# Altium PCB 主板-0915改综合.PcbDoc (part 2 of 3)
Units mm, origin at the board's own origin, x right, y up, seen from the top; angles counter-clockwise.
Board outline 97.69 x 103.45 mm, 2 copper layers (Top Layer, Bottom Layer); 78 components, 74 nets, 243 pads, 282 vias.
Unrouted connection lines stored in the file: 6.
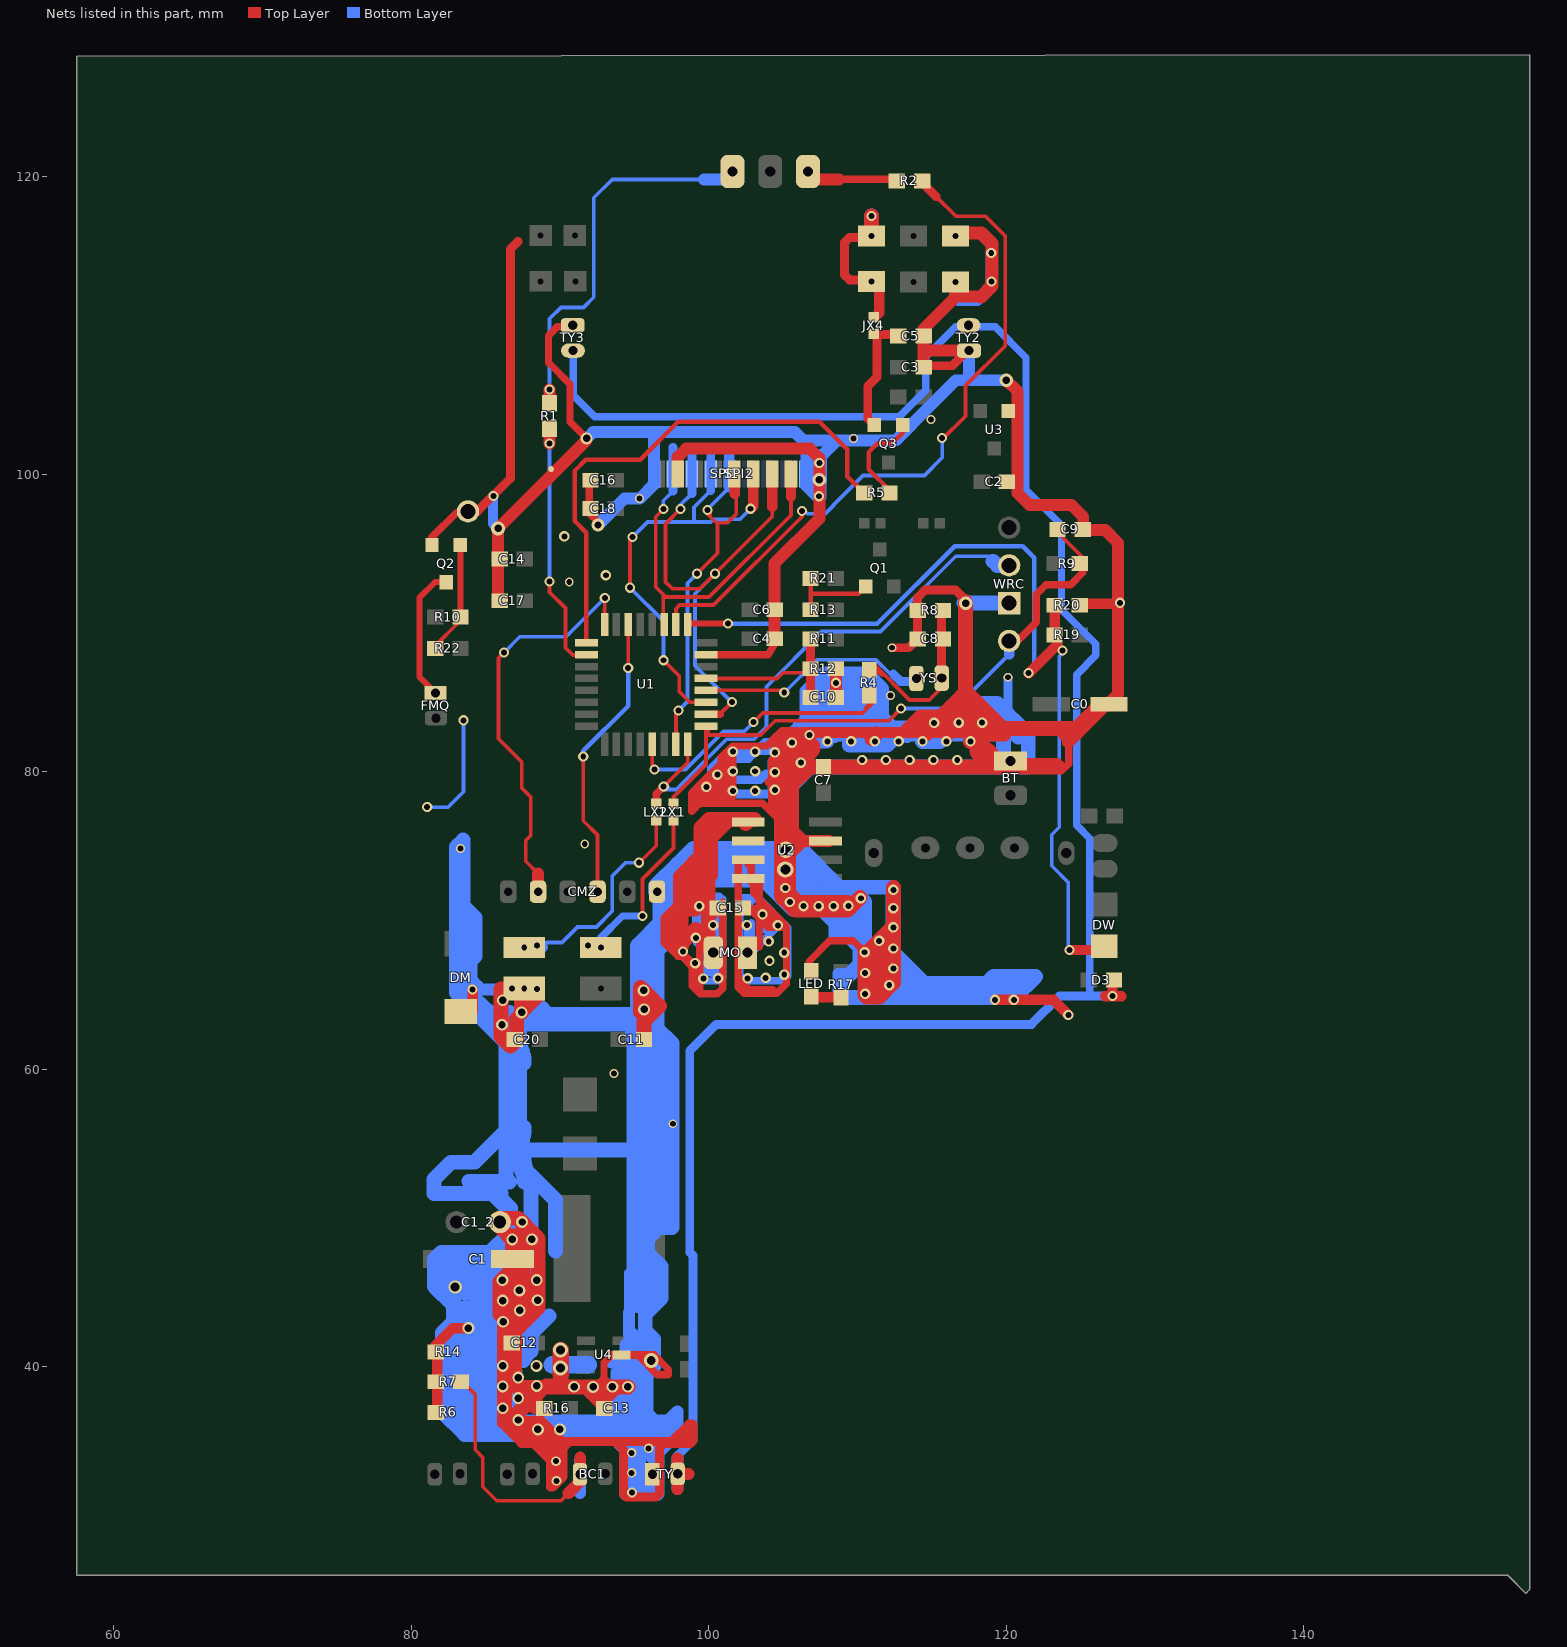
[diagram p2: the nets of this part, all layers, seen from the top]

## Via types
v1: diameter 0.7, hole 0.4, Top Layer to Bottom Layer, 111 vias
v2: diameter 0.68, hole 0.4, Top Layer to Bottom Layer, 90 vias
v3: diameter 0.8, hole 0.5, Top Layer to Bottom Layer, tented both sides, 27 vias
v4: diameter 0.6, hole 0.4, Top Layer to Bottom Layer, 13 vias
v5: diameter 0.9, hole 0.5, Top Layer to Bottom Layer, 8 vias
v6: diameter 0.65, hole 0.4, Top Layer to Bottom Layer, tented both sides, 6 vias
v7: diameter 0.8, hole 0.5, Top Layer to Bottom Layer, 6 vias
v8: diameter 1, hole 0.75, Top Layer to Bottom Layer, tented both sides, 5 vias
v9: diameter 3.4, hole 2.9, Top Layer to Bottom Layer, 4 vias
v10: diameter 0.8, hole 0.4, Top Layer to Bottom Layer, 2 vias
v11: diameter 1.1, hole 0.68, Top Layer to Bottom Layer, 2 vias
v12: diameter 1, hole 0.56, Top Layer to Bottom Layer, tented both sides, 2 vias
v13: diameter 1, hole 0.6, Top Layer to Bottom Layer, tented both sides, 2 vias
v14: diameter 0.9, hole 0.6, Top Layer to Bottom Layer, tented both sides, 1 vias
v15: diameter 0.95, hole 0.5, Top Layer to Bottom Layer, 1 vias
v16: diameter 0.7, hole 0.4, Top Layer to Bottom Layer, tented bottom, 1 vias
v17: diameter 1, hole 0.6, Top Layer to Bottom Layer, tented bottom, 1 vias

## Nets (pads, with @x,y where several pads share a name; then routed paths per layer and width w, separated by ;. In a path a pad name is that pad's centre, name@x,y a point inside that pad or via, vN(x,y) a via of type N, cw(c..) or ccw(c..) an arc to the next point about the centre after c; other vN are vias at no path point) (continued)
GND: BT.2 C0.2 C1.1 C1_2.1 C2.1 C3.1 C4.2 C5.1 C6.1 C7.1 C8.1 C9.1 C10.2 C11.2 C12.2 C13.2 C14.2 C16.1 C17.2 C18.1 C20.1 CMZ.2 DM.1 LED.1 pad.0@87.6,65.432 pad.0@89.408,100.355 pad.0@96.33,100.032 pad.0@116.6,112.932 pad.0@116.6,116.032 pad.4@83.82,97.511 Q2.2 R6.2 R7.1 R8.2 R12.1 R14.1 R16.2 R20.1 SPI1.7 SPI2.8 TY2.2 TY3.2 TY.2 U1.7 U2.3 U3.1 U4.2 WRC.2 | length 1496.6
  Top Layer w0.254: C0.2@126.695,84.557 C0.2@126.913,84.546
  Top Layer w0.495: U1.7@99.825,87.877 104.006,87.877 C4.2@104.523,88.724 ; C4.2@104.419,88.951 C4.2@104.65,88.951 ; C0.2@126.913,84.546 126.924,84.328 C0.2@126.924,84.633
  Top Layer w0.5: Q2.2@81.382,95.25 81.382,95.758 83.058,97.434 pad.4@84.201,97.434 ; 90.221,38.811 90.221,39.227 90.51,38.938 ; TY3.2@90.855,109.919 89.826,109.919 89.23,109.323 89.23,107.518 90.678,106.07 90.678,103.53 v7(91.796,102.413) ; v7@91.992,38.412 v7(92.227,38.647) 92.368,38.647 92.964,39.243 93.523,38.684 93.523,38.649 94.123,38.649 C13.2@92.939,37.465 ; C16.1@92.05,99.6 91.973,99.523 91.973,97.379 92.558,96.795 v5(92.558,96.596) ; 92.95,38.643 92.964,38.643 92.964,40.272 93.496,40.804 96.305,40.804 97.296,39.813 97.296,39.472 96.545,39.472 95.25,40.767 U4.2@94.539,40.767 ; 99.949,78.435 99.822,78.308 ; 104.013,79.299 104.242,79.527 ; 104.369,80.366 104.391,80.366 ; 104.572,82.423 104.496,82.347 ; 104.648,72.252 104.648,76.86 104.47,77.038 ; v1(105.588,81.966) 105.379,82.123 105.13,82.372 104.826,82.677 ; 106.248,82.779 112.981,82.779 ; 106.743,67.246 108.153,68.656 109.703,68.656 v1(110.49,67.869) ; LED.1@106.756,66.431 106.756,67.234 ; 116.459,82.779 117.831,82.779 ; 118.059,82.525 116.205,82.525 ; 118.059,82.537 116.218,82.537 ; 120.498,80.061 123.723,80.061 124.206,80.543 124.206,82.118 125.12,83.033 ; 124.003,81.915 124.003,82.525 124.003,82.753 124.117,82.639 ; 124.231,82.525 124.117,82.639 ; C0.2@126.924,84.633 C0.2@126.913,84.622 ; 99.416,77.902 98.857,77.343 98.857,78.562 100.838,80.543 100.838,80.975 101.6,81.737 103.886,81.737 104.47,82.321 ; 99.416,77.902 99.822,78.308 ; 99.416,77.902 99.289,77.775 99.263,77.775 99.263,78.99 101.397,81.124 101.397,80.747 ; 99.416,77.902 99.416,78.765 101.397,80.747 ; 99.416,77.902 103.607,77.902 104.242,77.267 ; 99.822,78.308 101.575,78.308 101.629,78.363 v1(101.629,78.715) v1(101.629,80.038) 101.629,80.979 101.397,80.747 ; 99.822,78.308 99.67,78.308 99.67,78.816 v1(99.847,78.994) 100.892,80.038 101.117,79.812 101.117,79.731 ; 100.635,79.248 101.117,79.731 ; 100.635,79.248 100,78.613 100.965,78.613 ; 100.635,79.248 100.635,78.943 100.965,78.613 ; 100.965,78.613 101.117,78.461 101.346,78.461 v1@101.346,79.959 ; 100.965,78.613 101.117,78.765 101.117,79.731 ; 101.117,79.731 v1@101.346,79.959 ; v1@101.346,79.959 101.397,80.01 101.397,80.747 ; 104.242,77.267 104.242,79.527 ; 104.242,77.267 104.47,77.038 ; 104.242,79.527 104.242,80.518 ; 104.242,79.527 104.391,79.527 104.391,80.366 ; 104.242,80.518 104.242,80.772 104.391,80.921 ; 104.242,80.518 104.391,80.667 ; 104.391,80.366 104.47,80.366 ; 104.391,80.366 104.391,80.667 ; 104.391,80.667 104.47,80.747 ; 104.391,80.667 104.391,80.921 ; 104.391,80.921 104.391,81.632 104.47,81.712 ; 104.391,80.921 v1@104.47,81.001 ; 104.47,77.038 104.47,80.366 ; 104.47,80.366 104.572,80.366 v1@106.731,82.525 ; 104.47,80.366 104.47,80.747 ; 104.47,80.747 106.248,82.525 v1@106.731,82.525 ; 104.47,80.747 v1@104.47,81.001 ; v1@104.47,81.001 104.47,81.712 ; v1@104.47,81.001 104.496,81.026 104.496,81.28 105.994,82.779 105.537,82.779 ; 104.47,81.712 105.537,82.779 ; 104.47,81.712 104.47,82.321 ; 104.47,82.321 104.496,82.347 ; 104.496,82.347 104.826,82.677 ; 104.826,82.677 104.928,82.779 105.537,82.779 ; v1@106.731,82.525 111.239,82.525 112.727,82.525 ; v1@106.731,82.525 106.743,82.537 111.252,82.537 112.74,82.537 ; 112.727,82.525 116.027,82.525 116.205,82.525 ; 112.727,82.525 112.74,82.537 ; 112.74,82.537 114.592,82.537 116.04,82.537 116.218,82.537 ; 112.74,82.537 112.981,82.779 ; 112.981,82.779 114.15,83.947 115.875,83.947 116.279,84.351 116.838,84.351 116.894,84.351 116.261,83.718 116.205,83.718 115.646,83.718 114.884,83.718 ; 112.981,82.779 113.538,82.779 ; 113.538,82.779 113.944,82.779 ; 113.538,82.779 114.198,83.439 ; 113.944,82.779 114.884,83.718 ; 113.944,82.779 114.706,82.779 114.833,82.779 115.265,82.779 116.218,82.779 116.218,82.715 116.218,82.537 ; 114.198,83.439 114.478,83.718 ; 114.198,83.439 113.919,83.439 114.198,83.718 114.478,83.718 ; 114.198,83.439 114.351,83.439 114.63,83.718 ; 114.478,83.718 114.63,83.871 114.783,83.871 114.63,83.718 ; 114.478,83.718 114.63,83.718 ; 114.63,83.718 114.884,83.718 ; 116.205,82.525 116.218,82.537 ; 123.685,80.48 123.485,80.68 120.853,80.68 121.218,80.315 122.504,80.315 123.52,80.315 123.685,80.48 ; 123.685,80.48 123.698,80.467 123.698,80.493 123.685,80.48 ; 124.117,82.639 126.024,84.546 C0.2@126.837,84.546 ; C0.2@126.837,84.546 C0.2@126.913,84.622 ; C0.2@126.837,84.546 C0.2@126.913,84.546 C0.2@126.913,84.622
  Top Layer w0.6: pad.4@83.82,97.511 84.455,97.511 86.665,99.72 86.665,115.138 87.173,115.646 ; 86.689,36.423 86.276,36.836 86.076,37.036 86.076,36.198 87.425,34.849 88.214,34.849 89.357,33.706 89.357,31.902 89.51,31.902 90.221,32.614 90.221,34.543 90.653,34.974 ; 86.69,36.423 87.219,36.423 87.546,36.423 87.774,36.195 89.475,34.493 89.764,34.493 ; v3@87.376,36.195 87.516,36.055 ; 88.033,35.369 87.49,35.369 87.49,35.827 87.744,35.827 ; 88.67,36.195 R16.2@88.67,36.957 ; 88.951,35.865 89.764,35.052 89.764,34.493 ; 88.951,36.195 90.165,34.98 ; v6@89.56,32.334 89.687,32.334 89.764,32.41 89.764,34.011 ; 89.852,35.052 90.22,34.684 90.22,34.926 90.165,34.98 ; 96.723,34.849 98.044,34.849 ; v4(112.319,88.341) 113.436,88.341 114.05,88.955 R8.2@114.05,91.232 ; 114.046,90.092 114.046,91.719 114.554,92.227 116.586,92.227 v5@117.272,91.542 ; C3.1@114.45,107.3 116.382,107.3 117.413,108.331 TY2.2@117.501,108.419 ; 87.516,36.055 86.652,36.055 87.511,35.196 88.578,35.196 89.764,34.011 ; 87.516,36.055 87.744,35.827 ; 87.744,35.827 88.117,35.454 88.117,35.642 87.933,35.827 87.744,35.827 ; 89.764,34.011 89.764,34.493 ; 90.165,34.98 93.696,34.98 ; 93.696,34.98 94.259,34.417 94.259,31.445 94.463,31.242 96.444,31.242 96.698,31.496 96.698,34.544 97.134,34.98 ; 93.696,34.98 97.134,34.98 ; 97.134,34.98 97.515,34.98 98.679,36.144 98.908,36.144 98.958,36.093 98.958,35.763 ; 98.044,34.849 98.171,34.976 ; 98.044,34.849 98.171,34.849 ; 98.171,34.849 98.171,34.976 ; 98.171,34.849 98.781,34.849 98.958,35.027 98.958,35.763 ; 98.171,34.976 98.958,35.763
  Top Layer w0.7: R14.1@81.65,41 81.65,41.442 82.804,42.596 v3(83.845,42.596) ; R6.2@81.737,36.932 R14.1@81.737,41.025 ; DM.1@83.34,63.885 84.125,63.885 v2(84.125,65.354) ; v1(119.253,64.668) 123.165,64.668 v1(124.181,63.652) ; R20.1@125.15,91.308 v2@127.432,91.308
  Top Layer w0.8: C17.2@85.847,91.465 v15(85.847,96.363) v7@91.796,102.311 ; 87.071,63.378 88.519,64.825 pad.0@88.519,65.1 ; pad.0@87.6,65.406 87.602,65.406 87.617,65.406 87.617,65.415 87.617,65.431 pad.0@87.617,65.457 ; 87.681,38.608 87.716,38.643 88.91,38.643 89.078,38.811 89.924,38.811 89.756,38.644 ; 88.316,37.922 89.037,38.644 89.756,38.644 ; 89.306,38.643 89.756,38.644 ; v7(90.957,38.659) 90.957,38.645 89.756,38.644 ; v7(92.227,38.647) 92.964,38.648 92.989,38.648 v7@93.523,38.649 ; SPI1.7@97.917,100.032 97.917,101.16 98.484,101.727 106.807,101.727 107.442,101.092 v1(107.442,100.762) v5(107.442,99.644) 107.442,97.028 104.419,94.005 C4.2@104.419,88.951 ; 105.156,71.704 105.156,71.933 v11@105.156,73.33 ; 105.156,76.86 v11@105.156,73.575 ; v11@105.181,72.923 105.181,73.304 v11@105.156,73.33 ; 105.588,76.124 106.35,75.362 105.318,74.33 105.318,73.575 v11@105.156,73.575 ; 106.07,75.362 U2.3@108.077,75.362 ; C10.2@108.55,85 R12.1@108.55,86.932 ; C3.1@114.45,107.3 114.45,109.776 116.6,111.926 pad.0@116.6,112.932 ; 114.503,108.331 117.413,108.331 TY2.2@117.475,108.331 ; 116.756,111.946 118.321,111.946 ; v5(117.272,91.338) v5@117.272,91.542 ; v5(120.015,106.324) 120.766,105.573 120.766,98.74 121.564,97.942 124.384,97.942 125.184,97.142 125.184,96.266 126.644,96.266 127.533,95.377 127.533,85.242 C0.2@126.924,84.633 ; v11@105.156,73.33 105.131,73.483 105.115,73.575 105.131,73.575 v11@105.156,73.575 ; v11@105.156,73.33 v11@105.156,73.575 ; 118.165,111.946 ccw(c118.165,112.467) 118.533,112.099 ; 118.165,111.946 ccw(c118.165,112.467) 118.533,112.099 ; 118.165,111.946 ccw(c118.165,112.467) 118.533,112.099
  Top Layer w0.9: pad.0@116.865,116.23 118.313,116.23 119.05,115.494 119.05,112.674 118.321,111.946
  Top Layer w1: C1_2.1@85.928,49.987 87.198,49.987 v3(87.452,49.733) 88.036,49.149 88.036,49.124 88.536,48.624 88.536,43.959 87.237,42.66 87.237,44.313 ; C1_2.1@85.95,49.727 85.95,49.407 86.8,48.557 v3@86.8,48.26 ; C1.1@86.04,47.269 86.538,47.269 86.8,47.007 C1.1@86.8,47.235 v3@86.8,48.26 ; v3(86.131,45.822) 86.131,44.45 v3(86.157,44.45) ; 86.233,43.588 86.462,43.816 86.157,44.121 v3@86.157,44.313 ; C12.2@86.276,41.437 86.276,36.836 86.276,36.762 86.652,36.386 ; 86.284,40.97 v3@86.284,43.078 ; C12.2@86.309,41.529 86.309,40.03 86.88,39.505 86.944,39.446 86.944,38.799 87.136,38.608 87.681,38.608 88.875,38.608 ; 86.741,42.748 85.95,43.539 85.95,45.716 86.8,46.566 v3@86.8,48.26 ; v3@86.8,48.793 87.494,48.099 ; 86.843,36.195 86.652,36.386 ; v3@86.944,39.497 86.944,43.663 v3@86.294,44.313 ; 87.071,63.378 87.071,61.951 86.677,61.557 86.03,62.205 86.03,65.406 87.6,65.406 pad.0@87.6,65.432 ; v3@87.376,36.195 87.774,36.195 88.67,36.195 ; v3(87.427,63.83) pad.0@87.427,65.329 ; 87.503,49.327 87.503,48.108 ; pad.0@87.612,65.41 87.617,65.406 pad.0@87.72,65.302 ; 87.655,45.364 v3@87.503,45.212 ; v3@88.036,48.889 88.036,48.641 87.503,48.108 ; v3@88.062,45.745 87.68,45.364 87.68,44.5 87.503,44.323 ; 88.316,37.311 88.316,37.922 ; 88.91,38.643 88.875,38.608 ; 89,38.649 v7@94.564,38.65 ; 90.043,39.1 v13(90.043,41.123) ; v7(92.227,38.647) 90.957,38.647 91.757,38.647 92.98,37.424 C13.2@92.98,37.2 ; C13.2@92.989,37.2 92.989,38.71 ; C11.2@95.65,62 95.65,63.633 95.428,63.856 95.428,65.507 95.86,65.075 96.685,64.249 95.86,63.424 ; 105.588,76.124 105.588,79.121 106.782,80.315 BT.2@121.218,80.315 ; v1@109.271,70.968 109.601,70.968 v1@110.185,71.552 ; 110.521,66.11 110.896,65.735 110.973,65.811 v1@112.116,65.811 ; v1@110.96,82.245 111.239,82.525 111.252,82.537 ; 111.633,67.869 v1@110.668,67.869 ; 111.735,66.167 111.735,66.192 ; v1@111.735,68.758 111.735,66.531 ; v1@112.166,65.761 v1@112.116,65.811 ; v1@112.344,66.531 111.735,66.531 ; v1@112.42,72.212 v1(112.42,70.841) v1@112.42,69.621 ; 114.592,82.537 114.833,82.779 ; 114.706,82.779 115.646,83.718 116.279,84.351 116.98,85.052 117.17,84.861 117.17,84.684 ; 115.265,82.779 116.205,83.718 116.838,84.351 117.17,84.684 ; 116.027,82.525 116.04,82.537 116.218,82.715 v1(116.815,83.312) ; v5(117.272,91.338) 117.272,85.42 119.786,82.906 124.765,82.906 125.755,83.896 ; v1(117.602,82.042) 118.059,82.499 ; 118.681,82.537 119.875,82.537 ; 124.003,82.525 124.231,82.525 ; 124.206,82.144 126.608,84.546 C0.2@126.913,84.546 ; v3@86.157,44.313 v3@86.294,44.313 ; v3@86.157,44.313 v3(86.157,44.45) ; v3(86.157,44.45) v3@86.294,44.313 ; v3@86.294,44.313 87.237,44.313 ; 86.652,36.386 86.689,36.423 88.875,38.608 ; 87.237,44.313 87.493,44.313 87.503,44.323 ; 87.237,44.313 v3@87.237,44.946 ; v3@87.237,44.946 v3@87.503,45.212 ; v3@87.237,44.946 87.02,44.729 87.02,47.625 87.494,48.099 ; 87.494,48.099 87.503,48.09 ; 87.494,48.099 87.503,48.108 ; 87.503,44.323 v3@87.503,45.212 ; v3@87.503,45.212 87.503,48.09 ; 87.503,48.09 87.503,48.108 ; pad.0@87.6,65.432 87.617,65.431 87.845,65.427 pad.0@87.723,65.305 ; pad.0@87.6,65.432 87.617,65.415 pad.0@87.723,65.305 ; pad.0@87.6,65.432 87.602,65.406 87.617,65.199 pad.0@87.72,65.302 ; pad.0@87.72,65.302 87.96,65.062 pad.0@87.723,65.305 ; pad.0@87.72,65.302 pad.0@87.723,65.305 ; 105.308,79.198 ccw(c105.308,80.058) 105.917,79.45 ; 105.308,79.198 ccw(c105.308,80.058) 105.917,79.45 ; 105.308,79.198 ccw(c105.308,80.058) 105.917,79.45 ; 105.321,79.2 ccw(c105.061,80.171) 105.932,79.668 ; 105.321,79.2 ccw(c105.061,80.171) 105.932,79.668 ; 105.321,79.2 ccw(c105.061,80.171) 105.932,79.668 ; 105.321,79.2 ccw(c105.061,80.171) 105.932,79.668 ; 105.321,79.2 ccw(c105.061,80.171) 105.932,79.668 ; 105.321,79.2 ccw(c105.061,80.171) 105.932,79.668 ; 105.344,79.283 cw(c104.755,78.694) 105.588,78.694 ; 105.344,79.283 cw(c104.755,78.694) 105.588,78.694 ; 105.344,79.283 cw(c104.755,78.694) 105.588,78.694 ; v1@110.49,66.531 111.396,66.531 ; v1@110.49,66.531 110.49,64.999 110.642,64.846 111.455,64.846 v1@112.42,65.811 ; v1@110.49,66.531 110.49,67.437 ; 110.49,67.437 111.396,66.531 ; 110.49,67.437 v1(110.49,67.869) v1@110.668,67.869 ; v1@110.668,67.869 v1@112.42,69.621 ; 111.396,66.531 111.735,66.192 ; 111.396,66.531 111.735,66.531 ; 111.735,66.192 111.735,66.531 ; 111.735,66.192 v1@112.116,65.811 ; v1@112.116,65.811 v1@112.42,65.811 ; v1@112.42,65.811 v1(112.42,66.777) v1(112.42,68.123) v1(112.42,69.545) v1@112.42,69.621 ; 117.17,83.795 117.17,82.829 118.643,82.829 118.643,83.223 118.529,83.337 117.78,83.337 117.78,84.404 117.17,83.795 ; 117.17,83.795 117.17,84.684
  Top Layer w1.1: v13@90.043,39.472 v13(90.043,41.123)
  Top Layer w1.5: 105.156,71.704 105.893,70.968 v1@109.271,70.968 ; v1@105.156,71.933 105.131,71.958 105.131,73.483 105.131,73.575 105.131,79.959 106.782,81.61 ; 118.285,81.407 118.407,81.407 118.75,81.153
  Bottom Layer w0.254: v2(81.077,77.622) 82.474,77.622 83.515,78.664 v2(83.515,83.464)
  Bottom Layer w0.4: SPI2.8@106.375,100.223 106.375,102.273
  Bottom Layer w0.6: 94.615,41.395 94.615,46.304 ; v1(99.847,78.994) v1@99.72,78.994 ; 103.835,79.858 103.447,79.469 100.922,79.469 v1(100.584,79.807) 100.584,80.14 101.215,80.772 101.215,80.899 102.667,80.899 v1(103.124,81.356) 103.193,81.425 104.234,81.425 104.445,81.636 104.115,81.966 103.782,81.966 103.33,81.513 101.483,81.513 100.18,80.211 100.18,79.809 99.365,78.994 ; 105.232,78.511 100.203,78.511 ; 108.344,70.015 108.344,68.821 109.537,68.821 109.957,68.402 109.957,66.523 108.687,66.523 108.61,66.446 108.61,64.745 108.864,64.745 ; 117.907,83.287 117.717,83.476 117.717,84.162 118.008,83.871 120.117,83.871 ; v4(120.117,86.36) 120.117,83.871 ; 120.244,83.312 120.117,83.439 120.117,83.871 ; 99.365,78.994 v1@99.72,78.994 ; 99.365,78.994 99.085,78.715 99.411,78.715 99.614,78.511 100.203,78.511 ; v1@99.72,78.994 100.203,78.511
  Bottom Layer w0.7: v2(85.522,98.552) 85.52,98.554 85.496,98.53 85.496,96.714 v15(85.847,96.363)
  Bottom Layer w0.8: 83.671,65.354 pad.0@87.621,65.354 ; 84.009,65.724 83.541,66.192 83.541,68.863 ; 84.033,65.684 84.072,65.724 84.072,67.103 ; 84.072,67.384 84.072,68.331 ; 86.614,63.833 86.711,63.833 ; 87.274,63.269 86.711,63.833 ; 87.6,62.944 90.38,62.944 cw(c90.38,65.29) 88.511,63.87 ; v3@87.617,63.817 87.602,63.833 86.711,63.833 ; pad.0@88.287,65.194 88.049,65.432 pad.0@87.6,65.432 89.227,63.805 95.152,63.805 ; 88.889,64.143 cw(c88.521,63.774) 89.041,63.752 ; 89.484,63.5 89.84,63.144 ; v7(91.796,102.413) 92.227,102.845 96.33,102.845 ; v5(92.558,96.596) 94.336,98.374 v4(95.352,98.374) 96.33,99.353 pad.0@96.33,100.032 96.33,102.845 ; 94.64,42.164 94.64,43.637 ; v3@95.555,63.805 96.418,63.805 ; 95.656,66.345 95.656,66.712 ; 96.314,33.881 96.52,34.087 97.892,35.458 97.892,37.008 97.18,36.297 ; v5@107.417,99.593 v1@107.417,100.533 ; v1@107.442,101.092 108.623,102.273 106.375,102.273 ; 107.442,101.321 106.832,101.321 106.832,101.816 106.375,102.273 ; v1@108.153,71.145 108.179,71.12 v1@108.382,70.917 ; 108.648,102.273 112.56,102.273 114.808,104.521 116.611,106.324 117.475,106.324 ; pad.0@116.6,112.932 116.6,111.924 116.815,111.709 118.059,111.709 118.999,112.649 v2(118.999,114.884) ; TY2.2@117.501,108.319 117.501,106.35 117.475,106.324 ; v5(120.015,106.324) 117.475,106.324 ; 83.541,68.863 83.541,69.85 84.072,69.318 ; 83.541,68.863 83.033,69.371 84.072,70.411 84.072,69.318 ; 83.541,68.863 84.072,68.331 ; 84.072,68.331 84.072,69.318 ; 96.33,102.845 105.804,102.845 106.375,102.273
  Bottom Layer w0.9: 82.855,42.726 83.976,42.726 84.099,42.603 84.404,42.298 84.7,42.002 84.712,41.99 85.014,41.688 85.271,41.431 85.656,41.046 87.046,39.656 87.046,36.779 86.652,36.386 ; 93.484,40.322 93.841,40.322 ; 93.841,39.599 93.841,37.009 94.742,36.108
  Bottom Layer w1: 82.677,47.346 v14@82.677,45.39 ; 82.702,45.847 v14@82.702,45.364 ; 82.855,44.907 82.855,44.094 ; 83.642,43.06 83.642,43.84 82.855,43.053 ; 83.642,44.907 83.642,45.364 ; 83.671,65.354 85.399,63.627 86.208,63.627 85.941,63.36 85.15,63.969 ; 83.871,52.476 84.861,52.476 ; v3@83.896,42.215 83.896,40.538 84.112,40.322 ; v3@84.049,42.799 83.976,42.726 v3(83.845,42.596) 83.642,42.393 83.642,38.151 83.782,38.011 ; 84.072,67.384 84.285,67.597 84.285,70.198 84.072,70.411 83.488,70.995 83.488,72.287 83.488,75.411 83.033,74.955 83.033,69.371 83.033,65.151 86.614,61.57 86.614,63.833 ; v3@84.099,42.603 84.099,43.917 83.033,43.917 82.855,44.094 ; 84.404,42.298 84.741,42.298 84.995,42.552 ; 84.49,36.567 84.112,36.944 ; 84.7,42.002 84.7,41.977 ; 84.712,41.99 84.7,41.977 ; 84.823,51.981 85.128,51.981 86.665,50.444 ; 85.119,41.279 85.271,41.431 86.055,42.215 ; 85.242,40.366 85.242,39.192 ; 85.446,51.689 85.496,51.638 ; 85.656,41.046 84.734,41.046 86.614,39.167 86.614,36.386 ; 85.674,41.046 86.893,41.046 ; 85.862,46.304 85.555,46.612 ; 86.004,52.476 84.861,52.476 ; 86.055,51.638 85.7,51.638 ; 86.335,48.463 85.725,47.854 85.471,47.854 86.335,48.717 C1_2.1@86.335,49.099 ; 86.36,54.729 87.6,54.576 ; 86.376,62.451 86.376,52.663 86.614,52.426 ; pad.0@86.521,65.432 pad.0@87.6,65.432 pad.0@86.664,65.429 ; 86.614,56.109 84.252,53.746 82.677,53.746 81.534,52.603 81.534,51.638 85.7,51.638 ; 86.614,61.684 cw(c87.515,61.684) 86.878,62.322 ; 86.665,49.047 86.665,50.673 85.7,51.638 ; 86.778,54.872 86.778,54.951 ; 86.807,62.322 cw(c84.893,60.408) 87.6,60.408 ; 86.868,41.021 86.893,41.046 ; 87.147,42.792 87.916,43.561 ; 87.274,63.269 87.274,54.902 87.6,54.576 ; v3@87.396,44.071 86.792,43.466 ; 87.6,52.68 87.6,54.576 ; 87.8,53.119 88.062,52.857 ; 89.256,43.409 88.062,42.215 ; 89.672,36.108 92.954,36.108 ; 89.704,47.777 89.704,51.215 88.062,52.857 ; 93.955,35.636 93.426,35.636 ; 94.615,37.186 94.656,37.144 ; 94.742,36.108 94.092,36.108 ; 94.793,42.164 95.783,41.173 95.783,40.208 94.92,39.345 94.92,41.758 ; 94.971,62.407 94.971,54.576 ; 95.098,49.835 95.758,50.495 ; 95.148,44.653 95.225,44.729 ; 95.148,46.228 95.148,46.076 ; 95.225,37.391 95.225,39.649 ; 95.225,44.12 95.225,44.729 ; 95.326,48.844 95.326,48.057 95.898,48.628 ; 95.326,50.927 95.326,51.155 ; 95.326,62.763 95.326,54.576 94.971,54.576 ; 95.327,61.713 cw(c97.266,61.713) 95.895,63.084 ; 95.327,62.763 96.52,62.763 ; 95.352,31.928 95.707,32.283 95.479,32.512 ; 95.824,63.084 cw(c94.758,62.017) 96.266,62.017 ; 95.838,63.074 cw(c95.5,62.386) 96.266,62.386 ; 95.858,63.069 cw(c95.831,62.381) 96.52,62.381 ; 95.898,44.552 95.898,45.402 ; 95.898,47.384 95.898,45.402 ; 95.898,49.416 95.898,48.984 ; 95.904,63.142 ccw(c96.52,63.454) 96.52,62.763 ; 95.961,49.708 96.19,49.708 ; 96.214,33.986 95.288,34.912 ; 96.284,35.456 96.314,35.486 ; 96.314,33.881 96.314,34.774 ; 96.52,68.123 96.52,62.763 ; CMZ.2@96.53,71.944 97.866,71.944 ; 96.622,49.708 95.898,48.984 ; 96.977,49.708 95.898,48.628 ; 97.18,36.297 96.319,36.297 95.782,36.834 95.782,39.47 96.291,39.98 96.291,41.859 95.733,42.418 95.733,43.536 96.799,44.602 96.799,46.736 95.898,47.638 95.898,48.628 ; 97.231,36.017 96.7,35.486 96.314,35.486 ; 105.08,81.306 105.08,79.575 104.496,78.991 104.496,80.696 ; v11(105.181,74.752) 106.274,74.752 108.788,72.238 112.395,72.238 112.395,65.43 113.005,64.821 ; 106.136,72.507 106.451,72.822 106.959,73.33 ; SPI2.8@106.649,100.666 106.649,99.294 v1(107.417,98.527) ; v1@106.782,82.524 v1@106.87,82.436 ; v1(107.391,70.968) v1(110.49,67.869) ; v1@107.417,98.501 v1(107.417,98.527) ; v5@107.417,99.593 v1(107.417,98.527) ; v5@107.442,99.492 v5(107.442,99.644) v1(107.442,100.762) v1@107.442,101.092 ; v1@108.179,70.915 v1@108.179,70.917 ; 108.179,71.806 108.179,72.517 ; 108.179,72.847 108.179,72.517 ; 108.471,82.436 107.975,82.436 ; 109.118,69.952 109.41,70.244 110.134,69.52 ; 109.466,86.335 109.466,82.525 ; 109.728,86.233 110.363,85.598 110.363,82.781 110.583,82.561 ; v1@110.409,64.969 110.557,64.821 113.005,64.821 ; 111.049,85.649 111.049,83.026 110.583,82.561 ; 112.395,65.938 111.912,66.421 111.582,66.421 112.395,67.234 ; v1@112.395,66.777 114.351,64.821 ; v1(112.42,68.123) 112.42,67.869 114.503,65.786 118.694,65.786 ; 113.342,82.448 113.342,82.525 ; v1(114.375,82.042) 115.545,82.042 116.027,82.525 ; v5@117.17,91.345 WRC.2@120.2,91.345 ; BT.2@120.297,80.674 BT.2@120.297,80.315 ; 120.371,65.507 120.802,65.938 120.802,66.243 ; 120.828,82.321 119.99,83.16 119.99,83.287 ; 82.042,47.701 83.796,47.701 ; 82.042,47.701 81.559,47.219 81.559,45.39 82.855,44.094 ; 82.042,47.701 82.042,46.025 v14@82.677,45.39 ; v14@82.677,45.39 v14@82.702,45.364 ; v14@82.702,45.364 v14(82.956,45.364) 83.642,45.364 ; 82.855,43.053 82.855,42.726 82.855,36.906 83.782,35.979 83.782,37.274 ; 82.855,43.053 82.855,44.094 ; 82.855,43.053 82.093,42.291 82.093,36.957 83.591,35.458 93.472,35.458 ; 83.642,45.364 84.099,44.907 ; 83.642,45.364 83.642,47.547 ; 83.642,47.547 83.947,47.547 84.099,47.395 84.099,44.907 ; 83.642,47.547 83.796,47.701 ; 83.782,37.274 83.414,37.643 83.782,38.011 ; 83.782,37.274 84.112,36.944 ; 83.782,37.274 83.782,38.011 ; 83.782,38.011 84.112,37.681 ; 83.796,47.701 85.319,47.701 85.014,47.396 85.014,43.993 ; 84.099,44.907 85.014,43.993 ; 84.112,36.944 84.112,35.979 84.607,36.474 ; 84.112,36.944 84.112,37.681 ; 84.112,37.681 84.112,40.322 ; 84.112,40.322 84.7,39.735 ; 84.112,40.322 84.112,41.389 84.7,41.977 ; 84.607,36.474 84.7,36.567 84.7,37.024 ; 84.607,36.474 85.496,35.585 85.496,38.075 85.242,37.821 ; 84.607,36.474 84.379,36.703 84.7,37.024 ; 84.7,37.024 84.7,37.681 ; 84.7,37.024 85.242,37.567 85.242,37.821 ; 84.7,37.681 85.103,37.681 85.242,37.821 ; 84.7,37.681 84.7,39.735 ; 84.7,39.735 84.7,41.977 ; 84.7,39.735 85.242,39.192 ; 84.861,52.476 85.7,51.638 ; 84.995,42.552 84.741,42.552 85.014,42.824 ; 84.995,42.552 85.014,42.552 85.014,42.57 ; 84.995,42.552 85.014,42.57 ; 85.014,42.57 85.598,43.155 85.598,43.409 85.555,43.452 ; 85.014,42.57 85.014,42.824 ; 85.014,42.824 85.555,43.365 85.555,43.452 ; 85.014,42.824 85.014,43.993 ; 85.014,43.993 85.555,43.452 ; 85.242,37.821 85.242,39.192 ; 85.242,39.192 86.055,38.379 86.055,36.297 92.765,36.297 92.954,36.108 ; 85.242,46.924 cw(c85.685,46.482) 86.122,46.929 ; 85.242,46.924 cw(c85.685,46.482) 86.122,46.929 ; 85.242,46.924 cw(c85.685,46.482) 86.122,46.929 ; 85.242,46.924 85.555,46.612 ; 85.242,46.924 85.42,47.102 ; 85.42,47.102 ccw(c85.837,47.519) 86.132,47.008 ; 85.42,47.102 ccw(c85.837,47.519) 86.132,47.008 ; 85.42,47.102 ccw(c85.837,47.519) 86.132,47.008 ; 85.42,47.102 85.95,47.632 ; 85.42,47.102 85.555,46.967 85.555,46.612 ; 85.555,43.452 85.555,46.612 ; 85.95,42.624 85.95,42.472 86.792,43.314 86.792,43.466 ; 85.95,42.624 86.792,43.466 ; 85.95,42.624 85.95,47.632 ; 85.95,47.585 ccw(c86.777,47.585) 86.192,47 ; 85.95,47.585 ccw(c86.777,47.585) 86.192,47 ; 85.95,47.585 ccw(c86.777,47.585) 86.192,47 ; 85.95,47.585 ccw(c86.777,47.585) 86.192,47 ; 85.95,47.585 ccw(c86.777,47.585) 86.192,47 ; 85.95,47.585 ccw(c86.777,47.585) 86.192,47 ; 85.95,47.585 ccw(c86.777,47.585) 86.192,47 ; 85.95,47.585 ccw(c86.777,47.585) 86.192,47 ; 85.95,47.585 ccw(c86.777,47.585) 86.192,47 ; 85.95,47.632 86.792,48.473 86.792,43.466 ; 86.048,41.046 cw(c86.048,38.931) 87.544,40.427 ; 86.048,41.046 cw(c86.048,38.931) 87.544,40.427 ; 86.048,41.046 cw(c86.048,38.931) 87.544,40.427 ; 86.731,53.985 ccw(c84.633,56.083) 87.6,56.083 ; 86.731,53.985 ccw(c84.633,56.083) 87.6,56.083 ; 86.731,53.985 ccw(c84.633,56.083) 87.6,56.083 ; 86.742,53.906 cw(c85.902,52.43) 87.6,52.43 ; 86.742,53.906 cw(c85.902,52.43) 87.6,52.43 ; 86.742,53.906 cw(c85.902,52.43) 87.6,52.43 ; 86.893,41.046 88.062,41.046 88.062,42.215 ; 86.893,41.046 88.062,42.215 ; 87.544,40.498 ccw(c86.293,41.748) 88.062,41.748 ; 87.544,40.498 ccw(c86.293,41.748) 88.062,41.748 ; 87.544,40.498 ccw(c86.293,41.748) 88.062,41.748 ; 87.6,53.869 ccw(c89.124,53.869) 88.046,52.791 ; 87.6,53.869 ccw(c89.124,53.869) 88.046,52.791 ; 87.6,53.869 ccw(c89.124,53.869) 88.046,52.791 ; 87.6,54.576 94.971,54.576 ; 88.062,42.215 88.062,45.745 88.062,52.857 ; 92.954,36.108 94.092,36.108 ; 92.954,36.108 93.523,36.678 94.092,36.108 ; 92.954,36.108 93.426,35.636 ; 93.426,35.636 93.294,35.636 93.472,35.458 ; 93.426,35.636 93.604,35.458 93.472,35.458 ; 93.472,35.458 94.463,34.468 94.463,32.055 ; 94.092,36.108 95.288,34.912 ; 94.463,32.055 95.288,32.88 95.288,34.912 ; 94.463,32.055 94.463,31.47 96.52,31.47 96.52,34.087 96.52,34.568 96.314,34.774 ; 94.656,37.144 94.656,36.432 96.284,34.804 ; 94.656,37.144 96.314,35.486 ; 94.971,54.576 94.971,46.253 95.148,46.076 ; 95.148,46.076 95.225,46.152 95.225,44.729 ; 95.225,44.729 95.898,45.402 ; 95.758,50.495 95.327,50.926 95.327,54.576 96.266,54.576 ; 95.758,50.495 96.368,49.886 ; 95.86,63.069 cw(c95.86,62.151) 96.509,62.8 ccw(c95.86,62.151) 95.86,63.069 ; 95.86,63.069 cw(c95.86,62.212) 96.465,62.818 ccw(c95.86,62.212) 95.86,63.069 ; 95.898,48.628 95.542,48.628 95.898,48.984 ; 95.898,48.628 95.898,48.984 ; 96.266,54.576 96.266,50.063 96.368,50.165 96.368,49.886 ; 96.266,54.576 96.266,62.509 96.901,61.874 96.901,54.576 ; 96.266,54.576 96.901,54.576 ; 96.284,34.804 96.284,34.816 96.314,34.846 ; 96.284,34.804 96.314,34.774 ; 96.314,34.774 96.314,34.846 ; 96.314,34.846 96.314,35.486 ; 96.368,49.886 96.901,50.419 96.901,54.576 ; 96.368,49.886 95.834,49.352 97.536,49.352 97.536,54.576 ; 96.52,62.763 97.536,61.747 97.536,54.576 ; 96.674,35.846 ccw(c96.502,36.017) 96.745,36.017 ; 96.674,35.846 ccw(c96.502,36.017) 96.745,36.017 ; 96.674,35.846 ccw(c96.502,36.017) 96.745,36.017 ; 96.901,54.576 97.536,54.576 ; 104.496,80.696 105.08,81.28 ; 104.496,80.696 104.47,80.67 104.47,78.965 104.696,78.74 105.258,78.74 106.832,80.315 118.828,80.315 ; 105.08,81.28 106.235,82.436 ; 105.08,81.28 105.08,81.94 106.604,83.464 106.604,85.395 107.798,86.589 110.617,86.589 111.633,85.573 111.633,83.668 112.092,83.208 ; 105.308,79.198 ccw(c105.308,80.181) 106.004,79.486 ; 105.308,79.198 ccw(c105.308,80.181) 106.004,79.486 ; 105.308,79.198 ccw(c105.308,80.181) 106.004,79.486 ; 105.321,79.2 ccw(c105.05,80.211) 105.957,79.688 ; 105.321,79.2 ccw(c105.05,80.211) 105.957,79.688 ; 105.321,79.2 ccw(c105.05,80.211) 105.957,79.688 ; 105.321,79.2 ccw(c105.05,80.211) 105.957,79.688 ; 105.321,79.2 ccw(c105.05,80.211) 105.957,79.688 ; 105.321,79.2 ccw(c105.05,80.211) 105.957,79.688 ; 106.235,82.436 v1@106.87,82.436 ; 106.235,82.436 106.219,82.436 106.121,82.533 106.121,83.083 v1@106.68,82.525 ; 106.235,82.436 106.324,82.525 v1@106.68,82.525 ; v1@106.68,82.525 v1@106.782,82.525 ; v1@106.782,82.525 v1@106.931,82.525 ; v1@106.782,82.525 106.782,84.303 ; 106.782,84.303 107.15,84.671 ; 106.782,84.303 106.782,84.379 107.112,84.709 107.15,84.671 ; v1@106.87,82.436 107.975,82.436 ; v1@106.87,82.436 107.249,82.057 107.927,82.057 107.975,82.105 107.975,82.436 ; v1@106.931,82.525 107.975,82.525 ; v1@106.931,82.525 107.442,83.036 107.442,84.379 107.15,84.671 ; 107.15,84.671 107.975,85.496 ; 107.975,82.436 107.975,82.525 ; 107.975,82.525 108.56,82.525 ; 107.975,82.525 107.975,85.496 ; 107.975,85.496 107.975,86.081 ; 107.975,85.496 v1@108.56,86.081 ; 107.975,86.081 107.95,86.081 106.883,85.014 106.883,85.496 107.975,86.589 107.975,86.081 ; 107.975,86.081 v1@108.56,86.081 ; 108.179,72.517 109.195,71.501 v1(110.236,71.501) 110.49,71.247 v1(110.49,67.869) ; 108.56,82.525 v1@108.56,86.081 ; 108.56,82.525 109.466,82.525 ; 109.466,82.525 109.466,81.788 111.992,81.788 112.513,82.309 112.308,82.309 112.092,82.525 ; 109.466,82.525 110.583,82.525 ; v1(110.49,67.869) 110.49,67.386 108.941,65.837 108.941,64.821 113.005,64.821 ; 110.583,82.525 110.583,82.488 110.62,82.525 ; 110.583,82.525 110.583,82.561 ; 110.583,82.525 110.62,82.525 ; 110.583,82.561 110.62,82.525 ; 110.62,82.525 112.092,82.525 ; 112.092,82.525 113.342,82.525 ; 112.092,82.525 112.092,83.208 ; 112.092,83.208 112.344,82.956 114.19,82.956 114.605,83.371 116.926,83.371 117.717,84.162 118.162,84.607 119.38,84.607 120.117,83.871 120.701,83.287 ; 113.005,64.821 114.351,64.821 ; 113.342,82.525 116.027,82.525 ; 114.351,64.821 v1@119.456,64.821 ; 116.027,82.525 119.507,82.525 119.812,82.829 119.812,81.299 118.828,80.315 ; 116.027,82.525 116.789,83.287 119.99,83.287 ; 118.694,65.786 119.151,66.243 121.971,66.243 120.548,64.821 119.939,64.821 ; 118.694,65.786 119.456,65.786 ; 118.694,65.786 119.456,65.024 ; 118.828,80.315 BT.2@120.297,80.315 ; v1@119.456,64.821 119.659,64.821 ; v1@119.456,64.821 119.456,65.024 ; 119.456,65.024 119.456,65.786 ; 119.456,65.024 119.659,64.821 ; 119.456,65.786 119.456,66.243 120.65,66.243 ; 119.456,65.786 120.193,65.786 120.65,66.243 ; 119.659,64.821 119.939,64.821 ; 119.939,64.821 120.853,65.735 120.853,66.243 120.802,66.243 ; 119.99,83.287 120.701,83.287 ; BT.2@120.297,80.315 121.488,80.315 121.488,82.499 120.701,83.287 ; 120.65,66.243 120.802,66.243
  Bottom Layer w1.2: 84.072,65.724 v2@84.364,65.432 ; pad.0@88.028,64.948 88.197,64.778 88.205,64.77 88.205,63.686 ; 89.484,40.132 91.897,40.132 ; 89.831,63.144 89.84,63.144 94.894,63.144 ; 94.615,37.186 94.615,41.395 ; 94.971,62.407 95.326,62.763 ; 95.152,63.402 94.894,63.144 ; v3@95.326,63.979 95.326,68.301 96.825,69.799 ; 95.327,62.763 95.708,63.144 ; v3(95.656,64.033) 95.656,65.456 95.656,66.345 ; 95.656,66.712 95.656,67.632 ; 96.241,63.677 95.708,63.144 ; 96.52,68.123 97.968,69.571 97.968,70.866 ; 97.307,71.166 97.866,70.608 97.866,71.944 97.866,72.583 98.867,73.584 98.867,73.203 ; 98.892,72.306 100.576,73.99 99.466,73.99 99.466,73.152 ; 99.455,72.836 102.173,72.836 ; 99.606,72.885 101.483,74.762 105.171,74.762 v11(105.181,74.752) ; 100.294,73.707 96.825,70.239 96.825,71.649 CMZ.2@96.53,71.944 96.53,72.298 97.98,73.749 98.994,74.762 102.093,74.762 ; 101.295,73.711 104.49,73.711 ; 101.987,73.863 102.593,73.256 ; 104.583,72.836 103.745,72.836 ; v11@105.054,73.431 102.768,73.431 102.593,73.256 ; v11@105.181,73.863 106.426,73.863 106.959,73.33 ; 105.461,72.822 106.451,72.822 107.163,72.822 ; 105.994,72.365 106.136,72.222 106.136,72.507 ; 107.213,72.085 105.705,72.085 105.156,71.536 108.88,71.536 109.576,70.841 105.74,70.841 103.745,72.836 ; v1@108.179,70.917 108.179,71.12 v1@108.179,71.145 ; 94.894,63.144 95.708,63.144 ; 102.173,72.836 103.014,72.836 ; 102.173,72.836 102.593,73.256 ; 102.593,73.256 103.014,72.836 ; 103.014,72.836 103.745,72.836
  Bottom Layer w1.5: v11@105.156,74.6 105.181,74.574 105.181,73.863 v11@105.181,72.923
  other v1: 120.523,64.668 110.515,65.075 88.443,65.405 86.766,65.43 112.141,65.659 110.515,66.472 111.455,68.631 106.375,70.968 108.407,70.968 109.398,70.993 105.461,71.247 112.42,72.06 105.156,72.187 103.124,78.715 104.445,78.791 104.445,79.985 103.124,80.038 106.197,80.62 110.312,80.797 111.912,80.797 113.512,80.797 115.112,80.797 116.712,80.797 104.445,81.305 101.629,81.356 107.975,82.042 109.575,82.042 111.175,82.042 112.775,82.042 115.975,82.042 106.782,82.474 115.164,83.287 118.389,83.312 108.56,85.979 93.091,93.218 90.297,95.834
  other v2: 127.66,91.364 119.024,112.954
  other v3: 88.519,35.789 89.992,35.789 87.198,36.423 86.157,37.21 87.198,37.896 86.157,38.683 88.443,38.71 87.198,39.268 86.157,40.056 88.417,40.056 86.182,43.028 87.3,43.79 88.494,44.475 87.274,45.136 88.443,45.822 86.792,48.565 88.113,48.565 86.106,62.992 86.157,64.643 95.631,65.303
  other v4: 97.587,56.337 93.624,59.715 83.312,74.854 91.669,75.159 112.217,85.141 90.627,92.761 109.728,102.413 114.96,103.683
  other v6: 94.844,31.547 89.764,32.334 94.818,32.868 89.738,33.655 94.818,34.214 95.961,34.519
  other v7: 93.523,38.659 94.564,38.659
  other v11: 105.156,73.431
  other v13: 90.043,39.929
  other v17: 96.139,40.411
HWKZ: R5.2 U1.17 | length 35.4
  Top Layer w0.3: U1.17@91.775,88.677 91.775,96.083 91.008,96.85 91.008,100.254 91.745,100.99 95.402,100.99 97.961,103.549 107.429,103.549 109.327,101.65 ; 109.327,101.675 109.327,99.848 R5.2@110.15,99.025
HWPOW: C5.2 JX4.1 JX4.2 pad.0@110.95,112.956 pad.0@110.95,116.032 Q3.2 | length 19.6
  Top Layer w0.6: pad.0@110.95,112.956 110.837,113.069 109.478,113.069 109.124,113.423 109.124,115.583 109.478,115.937 110.855,115.937 pad.0@110.95,116.032 ; Q3.2@111.14,103.307 110.693,103.754 110.693,105.918 111.303,106.528 111.303,109.398 112.51,109.398 C5.2@112.79,109.118
  Top Layer w0.7: pad.0@110.95,112.956 111.455,112.451 111.455,110.855 JX4.2@111.323,110.723
  Top Layer w1: pad.0@110.95,116.006 v2(110.95,117.373)
  Bottom Layer w1: pad.0@110.95,116.006 v2(110.95,117.373)
IRQ: SPI1.1 SPI2.1 U1.11 | length 26.3
  Top Layer w0.254: U1.11@96.952,89.902 96.952,91.923 ; v2(96.952,97.663) 96.444,97.155 96.444,92.431 96.952,91.923 ; 105.537,98.501 105.537,97.257 100.025,91.745 97.13,91.745 96.952,91.923
  Top Layer w0.7: 105.537,98.501 SPI1.1@105.537,100.032
  Bottom Layer w0.254: v2(96.952,97.663) 96.952,98.222 97.6,98.87
  Bottom Layer w0.6: 97.6,98.87 97.6,101.803
L-G: pad.0@101.6,120.36 R1.1 | length 28
  Top Layer w0.254: R1.1@89.387,104.656 R1.1@89.5,104.769
  Top Layer w0.8: R1.1@89.3,104.769 v2(89.3,105.704)
  Bottom Layer w0.254: v2(89.3,105.704) 89.3,110.458 90.068,111.227 91.592,111.227 92.278,111.912 92.278,118.593 93.517,119.832 pad.0@101.468,119.832 ; v2@89.3,105.904 v2@89.5,105.704
  Bottom Layer w0.8: 99.695,119.832 pad.0@101.6,119.832
L-G-D: R1.2 U1.18 | length 16.7
  Top Layer w0.254: v2(89.306,92.786) 89.306,92.075 90.373,91.008 90.373,88.341 90.856,87.859 U1.18@91.75,87.859
  Top Layer w0.8: v2(89.3,102.083) R1.2@89.3,103.069
  Bottom Layer w0.254: v2@89.3,92.786 v2(89.3,102.083)
L-R: 
L-R-D: R2.2 U1.10 | length 47.6
  Top Layer w0.254: U1.10@97.8,89.902 97.8,90.968 98.044,91.211 100.33,91.211 106.274,97.155 v2(106.274,97.536) ; 115.282,118.686 116.619,117.348 118.618,117.348 119.939,116.027 119.939,108.636 117.272,105.969 117.272,103.911 v2@115.697,102.337
  Top Layer w0.6: R2.2@114.236,119.732 115.282,118.686
  Bottom Layer w0.254: v2(106.274,97.536) 106.36,97.622 106.623,97.358 107.848,97.358 108.397,97.907 108.397,97.936 110.385,99.924 114.503,99.924 115.697,101.117 v2(115.697,102.438)
LED-G: 
LED-R: pad.0@106.68,120.36 R2.1 | length 6.7
  Top Layer w0.254: pad.0@106.68,119.832 106.68,119.609 pad.0@106.883,119.609 ; R2.1@112.536,119.507 R2.1@112.536,119.732
  Top Layer w0.5: 108.763,119.832 112.451,119.832 112.536,119.747 R2.1@112.536,119.507
  Top Layer w0.6: pad.0@106.883,119.609 pad.0@107.106,119.832
  Top Layer w0.8: pad.0@107.106,119.832 108.763,119.832
MISO: SPI1.2 SPI2.2 U1.2 | length 34.3
  Top Layer w0.254: v2(98.095,97.663) 97.104,96.672 97.104,92.761 97.561,92.304 99.416,92.304 104.267,97.155 104.267,97.815 ; 100.768,83.877 v2(101.575,84.684)
  Top Layer w0.5: U1.2@99.825,83.877 100.768,83.877
  Top Layer w0.7: 104.267,97.815 SPI1.2@104.267,100.032
  Bottom Layer w0.254: v2(98.095,97.663) 98.095,97.942 98.87,98.718 ; v2(100.432,93.32) 99.085,91.973 99.085,87.133 v2@101.56,84.658
  Bottom Layer w0.6: 98.87,98.718 98.87,101.803
MOSI: SPI1.3 SPI2.3 U1.3 | length 30.3
  Top Layer w0.254: v2@94.717,92.405 v2@94.717,95.783 ; v2(96.965,87.503) 98.019,86.449 98.019,85.395 98.73,84.684 U1.3@99.825,84.684
  Top Layer w0.7: v2(102.819,97.688) v2@102.997,97.866 ; 102.997,97.993 SPI1.3@102.997,100.032
  Bottom Layer w0.254: v2(94.717,92.38) 96.965,90.132 v2(96.965,87.503) ; v2(94.869,95.783) 95.885,96.799 100.13,96.799 100.308,96.977 102.108,96.977 v2(102.819,97.688) ; 99.009,96.799 99.009,97.79 100.14,98.921
  Bottom Layer w0.6: 100.14,98.921 100.14,101.803
NetC4_1: C15.1 MO.2 U2.5 U2.6 | length 108.8
  Top Layer w0.254: 97.206,69.723 97.231,69.698 ; 97.231,70.202 97.231,69.698 ; 97.447,67.958 97.828,67.958 96.977,68.809 96.977,69.266 97.079,69.367 ; 97.079,69.367 97.231,69.52 97.231,69.647 ; 97.079,69.367 97.561,69.367 97.257,69.672 ; 97.079,69.367 96.952,69.367 97.231,69.647 ; 97.231,69.647 97.257,69.672 ; 97.231,69.647 97.231,69.698 ; 97.231,69.698 97.257,69.672
  Top Layer w0.5: 97.184,69.295 97.561,69.672 97.565,69.676 ; v1@97.968,67.818 v1@98.146,67.818 ; 98.091,70.202 97.024,70.202 ; 98.095,70.206 98.4,70.51 ; 98.095,70.507 98.098,70.51 98.4,70.51 ; 98.095,71.272 97.024,70.202 ; 98.179,68.301 98.4,68.301 98.4,68.69 98.4,70.51 ; v1@98.882,67.158 98.222,67.818 v1@98.146,67.818 ; 99.974,71.323 99.162,70.51 98.4,70.51 ; C15.1@100.65,70.653 99.974,69.977 99.39,69.393 99.39,65.176 99.314,65.176 98.882,65.608 ; C15.1@100.94,71.245 100.94,65.43 100.584,65.075 99.416,65.075 98.882,65.608 ; 97.024,70.202 97.024,68.518 97.669,67.873 97.928,67.615 98.171,67.615 98.882,66.904 98.882,65.608 ; v1@98.146,67.818 98.294,67.67 98.095,67.869 v1@98.146,67.818 ; 97.739,67.869 97.917,67.869 97.828,67.958 97.739,67.869
  Top Layer w1: 97.561,69.672 97.561,68.918 98.095,68.385 ; 97.565,69.676 98.091,70.202 ; 98.098,70.51 98.505,70.917 98.628,70.917 98.984,71.272 98.984,73.863 99.162,74.041 99.974,73.228 ; 98.179,68.301 98.095,68.385 ; 99.103,69.393 98.4,68.69 98.095,68.385 ; 99.974,71.323 99.974,69.977 99.974,68.25 MO.2@100.533,67.691 ; 99.974,71.425 99.974,73.228 ; 99.974,75.082 99.974,73.228 ; 101.346,76.784 100.127,75.565 100.127,73.076 99.974,73.228 ; U2.5@102.489,76.505 U2.5@102.768,76.784 ; U2.5@103.073,76.784 100.025,76.784 99.466,76.225 99.466,74.32 98.095,72.949 98.095,71.272 98.095,70.507 98.095,70.206 98.095,68.385
  Bottom Layer w0.5: v1(99.136,68.834) 99.136,69.926 ; 99.293,70.201 99.2,70.294 ; 99.6,69.698 cw(c100.045,69.698) 99.73,70.012 ; v1@99.657,66.027 99.67,66.04 MO.2@99.67,67.081 ; 100,71.068 ccw(c100,71.738) 100.474,71.264 ; 100.041,71.059 ccw(c100.373,71.788) 100.94,71.222 ; 100.051,66.497 100.127,66.573 100.584,66.116 100.584,69.545 99.543,68.504 99.187,68.504 99.187,68.58 100.736,70.129 100.94,70.129 100.94,70.637 ; 100.076,71.032 cw(c100.426,71.329) 100.101,71.653 ; 100.1,70.968 cw(c100.648,70.968) 100.26,71.355 ; 100.819,69.884 100.889,69.954 100.889,70.129 ; 99.136,69.926 100.635,71.425 100.482,71.577 99.2,70.294 ; 99.136,69.926 99.136,70.231 ; 99.136,69.926 99.644,69.926 100.94,71.222 ; 99.136,70.231 99.2,70.294 ; 99.136,70.231 99.136,70.688 ; 99.136,70.688 99.136,70.968 99.822,71.653 100.101,71.653 ; 99.136,70.688 100.101,71.653 ; 100.101,71.653 100.508,71.653 ; 100.508,71.653 100.711,71.653 100.94,71.425 100.94,71.222 ; 100.508,71.653 100.94,71.222 ; 100.94,70.637 100.94,66.167 100.711,65.938 99.593,65.938 99.082,66.449 99.082,66.748 97.968,67.862 97.968,67.945 100.66,70.637 100.94,70.637 ; 100.94,70.637 100.94,71.222
  other v1: 99.644,66.091 100.635,66.116 99.085,67.132 98.273,67.92 100.305,69.698 99.365,70.968
NetC4_2: C15.2 MO.1 U2.7 U2.8 | length 65.1
  Top Layer w0.5: 101.981,73.762 101.981,66.237 ; U2.7@102.654,73.787 102.87,73.787 102.87,72.568 U2.8@103.022,72.568 ; U2.8@103.022,72.695 U2.8@103.022,72.568 ; 103.403,68.224 v1@103.403,70.151 ; 103.403,71.45 105.232,69.621 105.232,65.761 104.572,65.1 102.387,65.1 101.981,65.507 101.981,66.237 ; 103.403,71.501 103.022,71.882 U2.8@103.022,72.568 ; 104.305,65.354 102.743,65.354 101.981,66.116 101.981,66.237 ; v1@104.318,69.621 104.318,69.875 v1@103.48,70.714 ; U2.8@103.022,72.568 103.403,72.568 103.403,70.79 ; v1@103.403,70.151 103.403,70.714 ; v1@103.403,70.151 104.01,69.545 104.8,69.545 103.632,70.714 v1@103.48,70.714 ; v1@103.403,70.151 102.755,70.8 103.393,70.8 103.403,70.79 ; 103.403,70.714 v1@103.48,70.714 ; 103.403,70.714 103.403,70.79 ; 103.403,70.79 v1@103.48,70.714
  Bottom Layer w0.5: 102.083,70.671 cw(c102.938,70.671) 102.333,71.276 ; MO.1@102.616,68.17 v1@102.616,69.571 ; 102.715,70.981 cw(c103.327,70.91) 103.327,71.526 ; v1@102.863,69.869 102.863,67.843 v1@104.616,69.596 ; 105.105,69.748 105.334,69.52 105.334,66.243 105.034,65.944 102.484,65.944 102.083,66.345 102.083,71.526 103.327,71.526 ; 103.327,71.526 105.258,69.596 v1@104.616,69.596 ; 103.937,69.698 104.038,69.596 v1@104.616,69.596 ; 103.937,69.698 103.708,69.926 103.708,70.028 103.632,69.952 103.632,69.494 103.759,69.367 103.937,69.545 103.937,69.698 ; 103.937,69.698 v1@103.937,70.275 ; v1@103.937,70.275 v1@104.616,69.596 ; v1@103.937,70.275 103.48,70.732 103.625,70.732 103.937,70.421 v1@103.937,70.275
  other v1: 102.616,66.116 103.835,66.142 105.08,66.37 104.089,67.285 105.08,67.843 104.038,68.605 104.648,69.672 102.565,69.698 103.621,70.416
PB7: C10.1 R11.2 R12.2 U1.5 | length 11.5
  Top Layer w0.254: U1.5@99.825,86.277 104.616,86.277 105.003,86.664 106.85,86.664 R12.2@106.85,86.932
  Top Layer w0.6: C10.1@106.85,84.932 R12.2@106.85,86.932 R11.2@106.85,88.932
PC0: 
Q1-B: Q1.1 R13.1 R21.2 | length 5.9
  Top Layer w0.3: R13.1@106.85,90.856 106.85,91.973 ; R21.2@106.85,92.9 106.85,91.973 ; Q1.1@110.55,92.45 110.073,91.973 106.85,91.973
Q2-C: FMQ.1 Q2.3 | length 9
  Top Layer w0.4: FMQ.1@81.636,85.305 80.543,86.397 80.543,91.694 81.599,92.75 Q2.3@82.3,92.75
Q3-B: Q3.1 R5.1 | length 5.9
  Top Layer w0.3: R5.1@112.153,98.947 110.769,100.33 110.769,101.498 111.354,102.083 112.319,102.083 113.04,102.804
R7: BC1.2 R7.2 | length 22.4
  Top Layer w0.254: R7.2@83.45,38.989 84.303,38.136 84.303,34.417 84.811,33.909 84.811,31.928 85.75,30.988 90.068,30.988 BC1.2@91.344,32.264
  Top Layer w0.8: 90.576,31.496 91.344,32.264 BC1.2@91.344,32.774 ; 90.729,31.674 91.364,32.309 91.364,33.909
  Bottom Layer w0.254: 91.344,31.725 BC1.2@91.344,32.774
  Bottom Layer w0.8: 91.358,31.521 91.358,33.68
R10: 
R19: DW.2 R19.2 R20.2 U1.9 | length 61.6
  Top Layer w0.4: U1.9@98.6,89.967 v2(101.3,89.967)
  Top Layer w0.7: v2@121.526,86.627 123.45,88.55 ; R19.2@123.266,89.184 123.266,90.875 R20.2@123.45,91.059 ; v2(124.257,68.021) DW.2@126.771,68.021
  Bottom Layer w0.254: v2@123.8,87.986 123.571,87.757 123.571,76.276 123.063,75.768 123.063,73.685 124.181,72.568 124.181,68.101 v2@124.258,68.023
  Bottom Layer w0.3: v2(101.3,89.967) 111.339,89.967 116.546,95.174 116.561,95.174 121.107,95.174 121.895,94.386 121.895,87.02 v2(121.514,86.639)
  other v2: 123.8,88.163
R21: Q2.1 R10.1 R22.2 | length 7.9
  Top Layer w0.254: R22.2@81.559,88.427 R10.1@83.259,90.127 ; R22.2@81.61,88.2 R22.2@81.61,88.6
  Top Layer w0.4: Q2.1@83.033,95.504 83.312,95.225 R10.1@83.312,90.5
RST: C9.2 LX1.1 LX1.2 pad.0@92.75,68.182 R9.1 U1.1 WRC.1 | length 54.9
  Top Layer w0.254: v2@95.549,70.307 95.549,72.791 97.638,74.879 LX1.1@97.638,76.742 ; LX1.2@97.4,77.842 97.638,78.08 97.638,78.308 99.825,80.496 U1.1@99.825,82.904 ; U1.1@99.977,83.122 U1.1@99.977,83.077 ; U1.1@100.082,82.931 U1.1@100.076,82.925 ; v2@112.878,84.252 v2(112.928,84.252) 112.116,83.439 104.47,83.439 103.505,82.474 100.025,82.474 99.977,82.522 U1.1@99.977,82.904 ; C9.2@123.45,96.3 123.699,96.051 123.699,95.859 125.12,94.437 R9.1@125.12,94.005 ; U1.1@99.825,82.904 U1.1@99.825,83.077 ; U1.1@99.825,82.904 U1.1@99.977,82.904 ; U1.1@99.825,83.077 100.228,83.077 U1.1@100.076,82.925 ; U1.1@99.825,83.077 U1.1@99.977,83.077 ; U1.1@99.977,82.904 U1.1@99.977,83.077 ; U1.1@99.977,82.904 100.076,82.904 U1.1@100.076,82.925
  Top Layer w0.5: WRC.1@120.2,88.8 120.779,88.8 122.022,90.043 122.022,91.923 122.682,92.583 124.333,92.583 125.15,93.4 125.15,93.976 R9.1@125.12,94.005
  Top Layer w0.7: pad.0@92.75,68.182 pad.0@93.337,68.182
  Bottom Layer w0.254: v2@112.878,84.252 116.561,84.252 120.2,87.891
  Bottom Layer w0.3: pad.0@92.75,68.182 pad.0@92.75,68.849
  Bottom Layer w0.5: pad.0@92.75,68.849 94.209,70.307 v2(95.555,70.307)
  Bottom Layer w0.7: 120.2,87.891 WRC.1@120.2,88.8
  other v10: 91.897,68.326
RT: 
SCK: SPI1.4 SPI2.4 U1.31 | length 29.2
  Top Layer w0.254: U1.31@97.8,81.853 97.8,83.957 v2(97.968,84.125) ; v2(99.212,93.32) 100.584,94.691 100.584,96.672 100.508,96.749 ; v2(99.924,97.612) 99.924,97.333 100.101,97.155 ; v2@100.101,97.434 100.101,97.155 ; SPI1.4@101.727,100.032 SPI1.4@101.727,100.406 ; SPI1.4@101.854,100.406 101.854,97.333 101.27,96.749 100.508,96.749 ; 100.101,97.155 100.508,96.749
  Top Layer w0.7: SPI1.4@101.727,100.406 SPI1.4@101.759,99.955 ; 101.752,98.679 SPI1.4@101.752,100.21
  Bottom Layer w0.254: v2(97.968,84.125) 98.577,84.734 98.577,92.685 v2(99.212,93.32) ; v2@99.898,97.638 SPI2.4@101.397,99.136
  Bottom Layer w0.7: SPI2.4@101.397,99.136 101.397,101.752
SWIM: LX2.1 LX2.2 pad.0@87.6,68.182 U1.32 WRC.3 | length 51.6
  Top Layer w0.254: v2(95.326,73.889) 96.469,75.032 LX2.1@96.469,76.742 ; v2(96.977,79.019) 98.6,80.642 U1.32@98.6,81.852
  Top Layer w0.5: LX2.2@96.469,77.842 96.469,78.511 v2(96.977,79.019)
  Bottom Layer w0.254: 89.103,68.529 90.145,68.529 91.186,69.571 92.456,69.571 93.523,70.637 93.523,73 94.412,73.889 v2(95.326,73.889) ; v2(96.977,79.019) 96.977,78.816 97.823,78.816 101.201,82.194 103.048,82.194 103.886,83.033 103.886,85.725 107.594,89.433 111.557,89.433 116.611,94.488 119.126,94.488 119.126,94.158 ; v2@97.104,79.121 97.358,78.867
  Bottom Layer w0.8: pad.0@87.6,68.182 pad.0@87.968,68.182 ; pad.0@87.986,68.199 88.773,68.199 pad.0@88.809,68.235
  Bottom Layer w1: 119.126,94.158 119.431,93.853 WRC.3@120.2,93.853
  other v10: 88.443,68.326
SWIM/BT: 
T-LED: LED.2 R17.1 | length 2
  Top Layer w0.7: LED.2@106.9,64.831 107.544,64.831 R17.1@108.9,64.831
TEMP: 
TY: D3.2 TY2.1 TY3.1 TY.1 | length 150.8
  Top Layer w0.7: 126.644,64.922 127.737,64.922 ; v2(127.15,64.92) D3.2@127.15,66
  Top Layer w0.8: TY.1@97.914,32.8 TY.1@97.917,32.8 ; 97.917,31.775 TY.1@97.917,32.8 ; 97.917,33.833 TY.1@97.917,32.8 ; 98.654,32.8 TY.1@97.917,32.8
  Bottom Layer w0.5: TY3.1@90.881,108.419 90.881,105.308 92.329,103.861 112.801,103.861 114.605,105.664 114.605,107.925 116.599,109.919 119.265,109.919 121.336,107.848 121.336,98.958 123.723,96.571 123.723,90.907 126.035,88.595 126.035,87.833 124.739,86.538 124.739,76.403 125.628,75.514 125.628,64.922 ; 125.882,64.922 125.885,64.92 v2(127.15,64.92)
  Bottom Layer w0.6: 97.917,33.884 97.917,34.033 98.933,35.049 98.933,47.487 98.73,47.69 98.73,61.239 100.508,63.017 121.691,63.017 123.596,64.922 v2@127.15,64.922
  Bottom Layer w0.8: 97.917,31.775 97.917,33.884
Y30: CMZ.6 U1.16 | length 27.7
  Top Layer w0.254: v2(86.233,88.011) 85.877,87.655 85.877,82.22 87.427,80.67 87.427,78.918 88.036,78.308 88.036,75.717 87.706,75.387 87.706,73.99 88.53,73.166 ; U1.16@93,89.902 93,90.917 93.015,90.932 v2(93.015,91.694)
  Top Layer w0.8: CMZ.6@88.53,71.944 88.53,73.166
  Bottom Layer w0.254: v2(86.233,88.011) 87.3,89.078 90.399,89.078 v2(93.015,91.694)
Y30-D: 
Y>: CMZ.4 U1.14 | length 19.6
  Top Layer w0.254: v2(91.567,81.026) 91.567,76.708 92.53,75.745 CMZ.4@92.53,71.944 ; v2@94.6,86.97 U1.14@94.6,89.902
  Bottom Layer w0.3: v2(91.567,81.026) 91.567,81.407 94.59,84.43 v2(94.59,86.97)
YS: C8.2 R4.1 R8.1 YS.1 | length 11.7
  Top Layer w0.254: R4.1@110.846,87.147 111.201,87.147 113.513,84.836 114.833,84.836 115.664,85.667 YS.1@115.664,86.075 ; 111.328,86.817 111.133,86.736 111.735,86.487
  Top Layer w0.6: YS.1@115.664,86.6 R8.1@115.664,90.881
YS-U: R4.2 U1.29 | length 19.8
  Top Layer w0.254: U1.29@96.2,81.853 96.2,80.304 v2@96.393,80.112 ; v2(103.022,83.337) 103.632,83.947 110.363,83.947 110.753,84.337 ; R4.2@110.8,85.15 110.8,84.574 110.563,84.337 110.753,84.337 ; R4.2@111.1,84.734 R4.2@111.125,84.709 ; R4.2@111.125,84.912 R4.2@111.125,84.709 ; 110.753,84.337 R4.2@111.125,84.709
  Bottom Layer w0.254: v2(96.368,80.162) 98.45,80.162 100.99,82.702 102.387,82.702 v2(103.022,83.337)
YS_D: U1.4 YS.2 | length 15.7
  Top Layer w0.254: U1.4@99.825,85.478 104.932,85.471 v2(105.081,85.321)
  Bottom Layer w0.254: v2(105.081,85.321) 107.289,87.528 111.252,87.528 112.206,86.574 112.409,86.574
  Bottom Layer w0.6: 112.409,86.574 112.903,86.081 YS.2@113.995,86.081
ZFKZ: 
pads on no net: U4.6
copper on no net:
  other v8: 93.294,44.069 93.37,45.466 93.37,46.914 93.37,48.412 93.37,49.86
  other v9: 82.557,57.679 125.775,60.079 89.13,119.579 119.262,119.579